# Altium PCB depth sensor.PcbDoc
Units mil, origin at the board's own origin, x right, y up, seen from the top; angles counter-clockwise.
Board outline 925 x 1535 mil, 2 copper layers (Top Layer, Bottom Layer); 23 components, 16 nets, 80 pads, 48 vias.
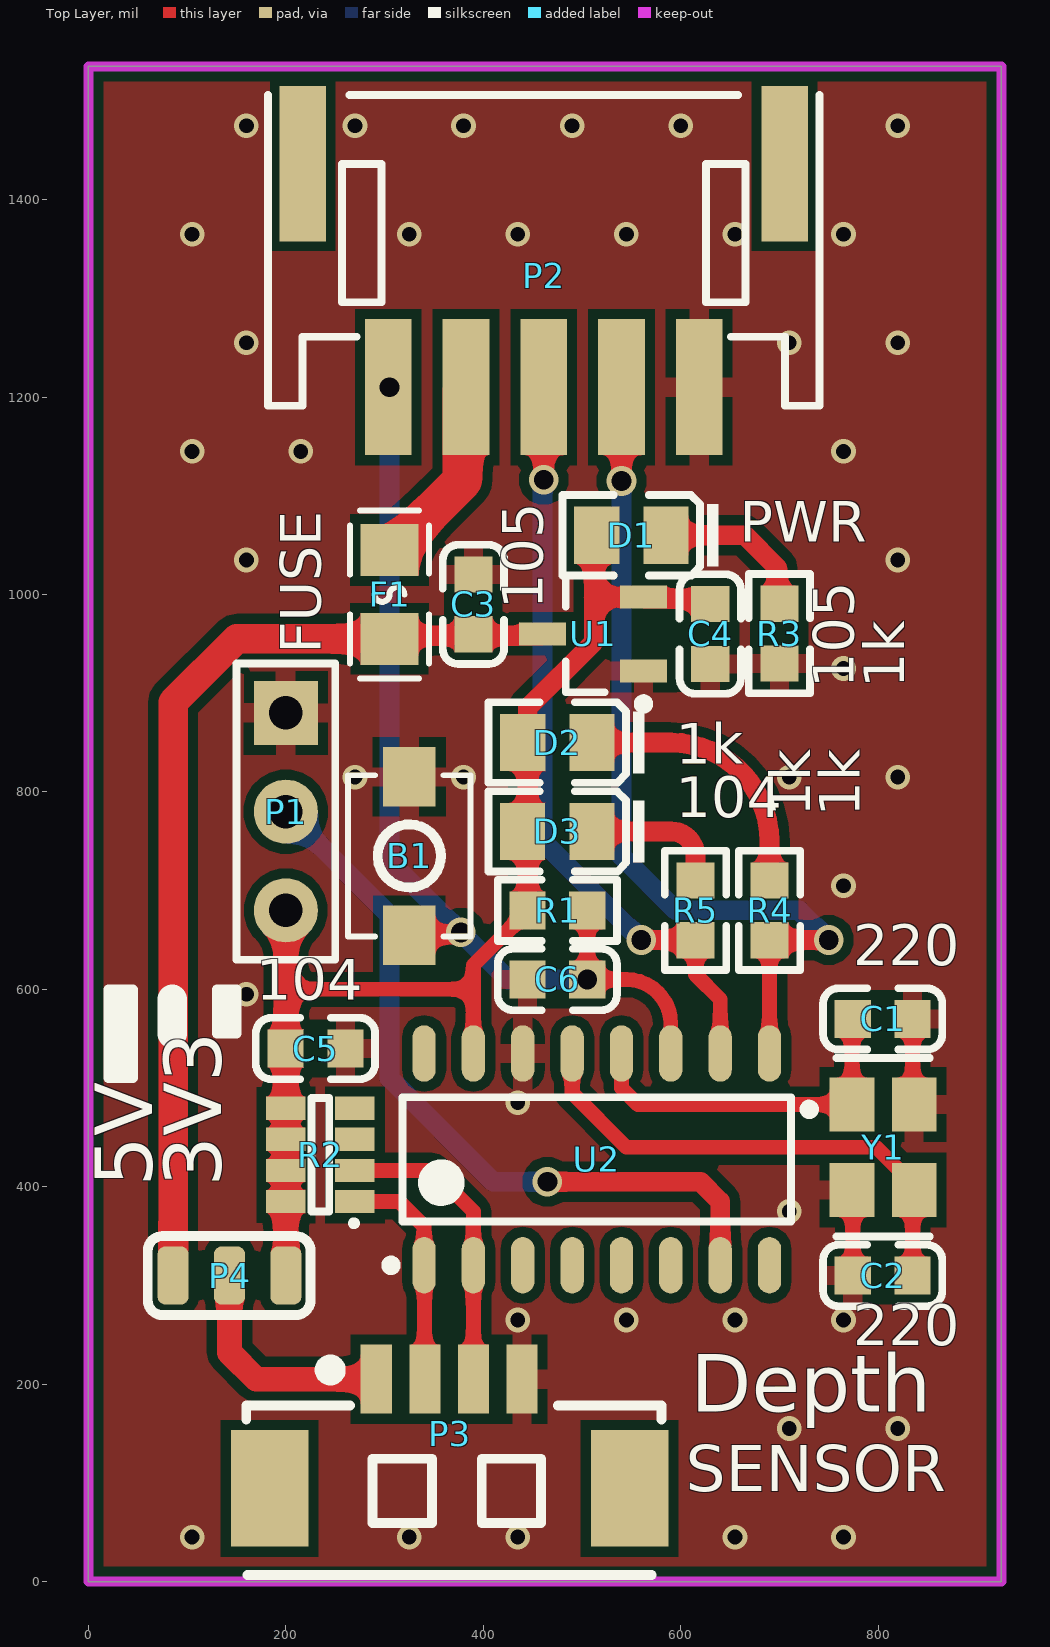
[diagram p0: Top Layer view]
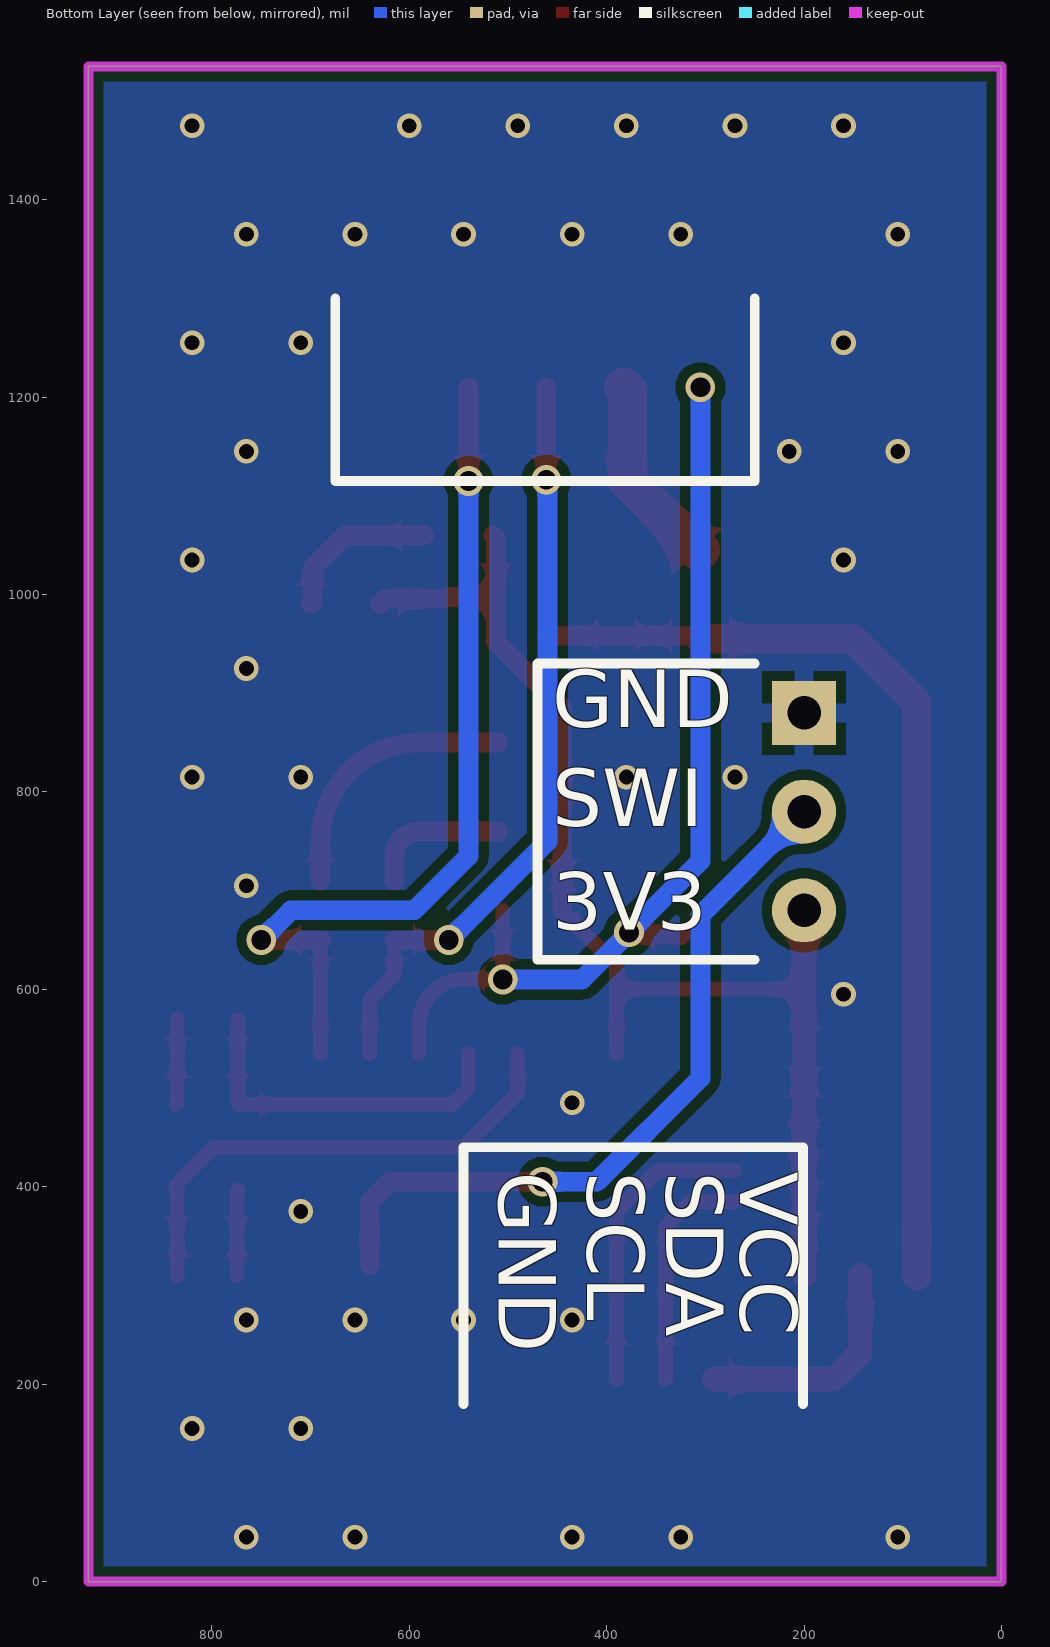
[diagram p1: Bottom Layer view, seen from below]
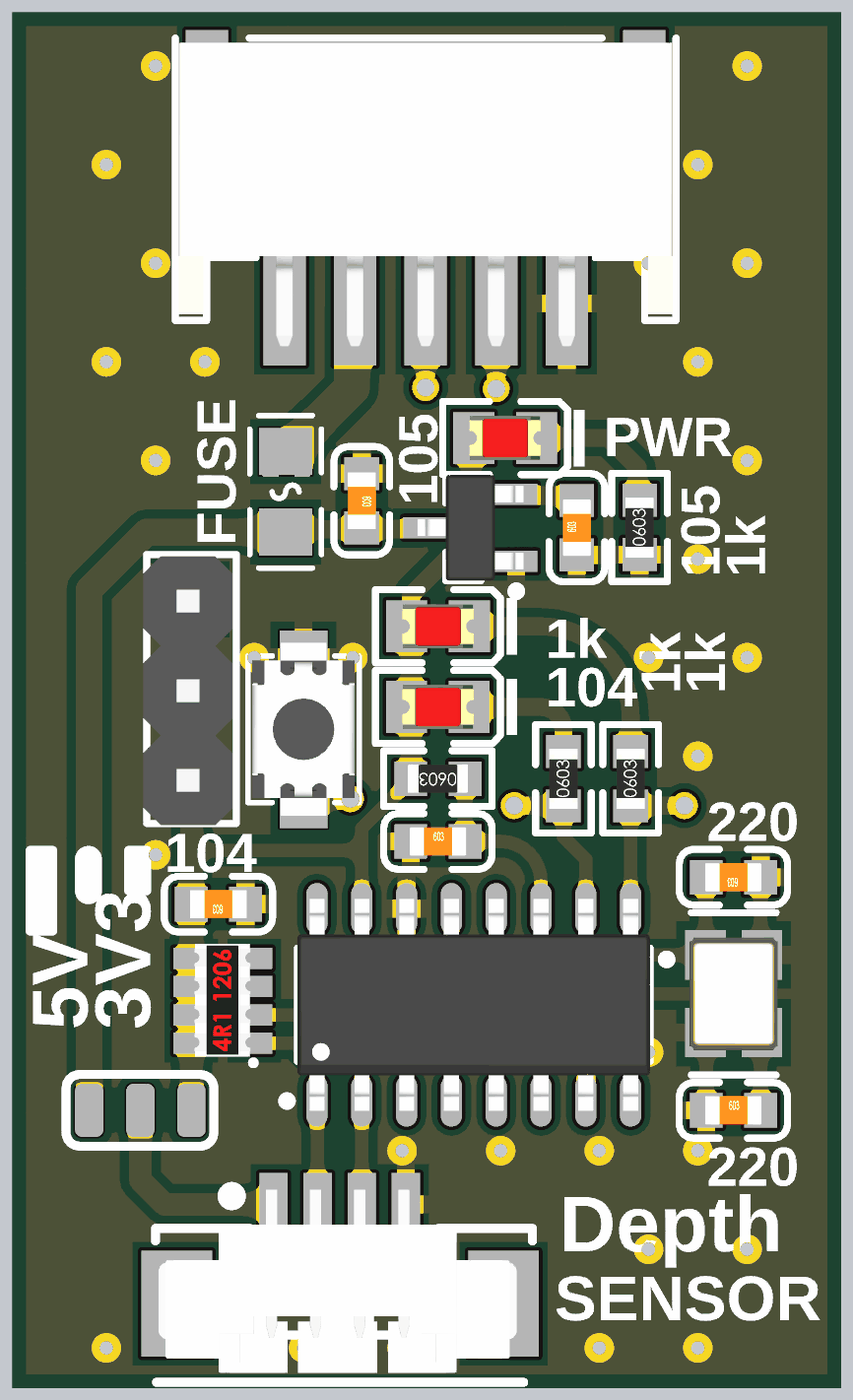
[diagram p2: 3D render of the assembled board from above, using the file's embedded part models]

## Layer stack, top to bottom
Top Solder: solder mask 0.4, Solder Resist, Dk 3.5
Top Layer: signal copper 1.4
Dielectric 1: dielectric 12.6, FR-4, Dk 4.8
Bottom Layer: signal copper 1.4
Bottom Solder: solder mask 0.4, Solder Resist, Dk 3.5

## Board outline
0,0 0,1535 925,1535 925,1485 925,220 925,0

## Design rules (kind name [scope] priority, off if disabled: settings)
Clearance [All] p1: gap=10 ignorepadtopadclearanceinfootprint=FALSE except(0: Arc-Hole Track-Hole SMDPad-Hole THPad-Hole Via-Hole Fill-Hole Poly-Hole Region-Hole Text-Hole; 5: Arc-Arc Arc-Track Arc-SMDPad Track-Track Track-SMDPad SMDPad-SMDPad)
PolygonConnect [All] p1: thpad.connectstyle=Relief thpad.reliefconductorwidth=20 thpad.reliefentries=4 thpad.polygonreliefangle="90 Angle" thpad.airgapwidth=10 smdpad.connectstyle=Relief smdpad.reliefconductorwidth=20 smdpad.reliefentries=4 smdpad.polygonreliefangle="90 Angle" smdpad.airgapwidth=10 via.connectstyle=Direct via.reliefconductorwidth=20 via.reliefentries=4 via.polygonreliefangle="90 Angle" via.airgapwidth=10
RoutingVias [All] p1: holewidth=28 width=50 viastyle="Through Hole" minholewidth=8 minwidth=12 maxholewidth=28 maxwidth=50
SolderMaskExpansion [All] p1: expansion=4 istentingtop=FALSE
Width [All] p1: maxlimit=200 minlimit=5 preferedwidth=10 minimp=50.000000 maximp=50.000000 favimp=50.000000
30 further rules are at their usual default settings.

## Components (designator, comment, footprint, x,y, rotation, side; value= is the part's Value field where it differs from the comment)
B1 "TS342A2P-WZ" SW-SMD_L4.0-W2.9-LS5.0 325,735.12 r270 top
C1 "22pF (220) 5% 50V" 0603_C 804.68,570 r180 top
C2 "22pF (220) 5% 50V" 0603_C 804.68,310 r0 top
C3 "1uF (105) 10% 50V" 0603_C 390,990 r270 top
C4 "1uF (105) 10% 50V" 0603_C 630,960 r90 top
C5 "100nF (104) 10% 50V" 0603_C 230,540 r180 top
C6 "100nF (104) 10% 50V" 0603_C 475,610 r0 top
D1 "红灯 0805" 0805_LED_S1 550,1060 r180 top
D2 "蓝灯 0805" 0805_LED_S1 475,850 r180 top
D3 "翠绿 0805" 0805_LED_S1 474.96,760 r180 top
F1 "SMD0805-110" F0805 305,1000.02 r270 top
P1 "Header 3" "Header 3" 205.18,785.97 r270 top
P2 "接线端子-5PIN" PH2.0-WS-5P 474.52,1363.01 r180 top
P3 "4PIN" MX1.25WS-4PIN 181.94,97.35 r0 top
P4 "电压选择" change 200,310 r270 top
R1 "1KΩ (1001) ±1%" 0603_R 475,680 r180 top
R2 "Res-4" res-4 233,430 r180 top
R3 "1KΩ (1001) ±1%" 0603_R 700,960.31 r90 top
R4 "1KΩ (1001) ±1%" 0603_R 690,680 r90 top
R5 "1KΩ (1001) ±1%" 0603_R 615,680 r90 top
U1 "LDO-3.3V" SOT95P290X110-3N 511.18,960 r180 top
U2 "MCU" TSOP127P600X155-16N 515,427.72 r90 top
Y1 "TSX-3225 24.0000MF20G-AC3" FP-TSX-3225-MFG 805,440 r270 top

## Footprints (in the part's own frame and the unit in brackets; to place one, negate y for a bottom-side part, rotate by r counter-clockwise, add the part's x,y. Pads: shape width x height; smd on the part's side, far side on the other; paste and mask are expansions set on the pad)
0603_C [mm]
  rect 0.93x0.98 smd: 1(-0.77,0) 2(0.77,0)
  silkscreen extent -1.53,-0.79 1.54,0.79, body extent -0.8,-0.4 0.8,0.4, height 0.3
0603_R [mm]
  rect 0.93x0.98 smd: 1(-0.77,0) 2(0.77,0)
  silkscreen extent -1.53,-0.79 1.54,0.79, body extent -0.85,-0.4 0.85,0.4, height 0.56
0805_LED_S1 [mm]
  rect 1.16x1.47 smd: A(0.89,0) K(-0.89,0)
  silkscreen extent -2.24,-1.04 1.77,1.03, body extent -1.01,-0.62 1.01,0.62, height 1.1
change [mm]
  rrect50% 1.5x0.8 smd mask+0.051: 1(0,0) 2(0,-1.45) 3(0,-2.9)
  silkscreen extent -1.02,-3.56 1.02,0.64
F0805 [mm]
  rect 1.335x1.5 smd mask+0.051: 1(-1.142,0) 2(1.142,0)
  silkscreen extent -2.16,-1.02 2.16,1.02
FP-TSX-3225-MFG [mm]
  rect 1.4x1.15 smd paste+0 mask+0: 1(-1.1,-0.8) 2(1.1,-0.8) 3(1.1,0.8) 4(-1.1,0.8)
  silkscreen extent -2.3,-2.02 2.3,1.2, body extent -1.9,-1.48 1.9,1.48, height 0.25
"Header 3" [mil]
  rect 65x65 hole 34: 1(-94.03,-5.18)
  round 65 hole 34: 2(5.97,-5.18) 3(105.97,-5.18)
  silkscreen extent -144,-55 156,45, body extent -142,-59 158,41, height 336
MX1.25WS-4PIN [mm]
  rect 2x3 smd: 0(0.042,-0.076) 0(9.306,-0.076)
  rect 0.8x1.778 smd: 1(2.785,2.734) 2(4.035,2.734) 3(5.285,2.734) 4(6.535,2.734)
  silkscreen extent -0.56,-2.3 10.12,3.17, body extent -0.47,-2.04 9.68,3.15, height 3.4
PH2.0-WS-5P [mm]
  rect 1.2x4 smd: 0(-5.863,-1.864) 0(6.537,-1.864)
  rect 1.2x3.5 smd: 1(-3.663,3.886) 2(-1.663,3.886) 3(0.337,3.886) 4(2.337,3.886) 5(4.337,3.886)
  silkscreen extent -6.76,-3.64 7.43,4.37, body extent -6.66,-3.51 7.34,5.09, height 5.55
res-4 [mil] "排阻"
  rect 40x23.62 smd: 1(-37,45) 2(-37,13.5) 3(-37,-17.99) 4(-37,-49.49) 5(33,-49.49) 6(33,-17.99) 7(33,13.5) 8(33,45)
  silkscreen extent -37,-60 7,68, body extent -33,-66 30,60, height 23
SOT95P290X110-3N [mm] "SOT23, 3-Leads, Body 2.90x2.90mm, Pitch 0.95mm, IPC Medium Density"
  rect 1.2x0.6 smd: 1(-1.3,0.95) 2(-1.3,-0.95) 3(1.3,0)
  silkscreen extent -1.43,-1.5 0.7,1.92, body extent -1.5,-1.5 1.5,1.5, height 1.1
SW-SMD_L4.0-W2.9-LS5.0 [mm]
  rect 1.53x1.36 smd mask+0.051: 1(-2.035,0) 2(2.035,0)
  silkscreen extent -2.08,-1.58 2.08,1.58, body extent -2.45,-1.45 2.45,1.45, height 2
TSOP127P600X155-16N [mm] "TSOP, 16-Leads, Body 10.00x3.90mm, Pitch 1.27mm, IPC Medium Density"
  oval 1.45x0.6 smd: 1(-2.725,4.445) 2(-2.725,3.175) 3(-2.725,1.905) 4(-2.725,0.635) 5(-2.725,-0.635) 6(-2.725,-1.905) 7(-2.725,-3.175) 8(-2.725,-4.445) 9(2.725,-4.445) 10(2.725,-3.175) 11(2.725,-1.905) 12(2.725,-0.635) 13(2.725,0.635) 14(2.725,1.905) 15(2.725,3.175) 16(2.725,4.445)
  silkscreen extent -2.85,-5 1.6,5.42, body extent -3,-5 3,5, height 1.55

## Part data
B1: JLCPCB Part Class="Extended Part", LCSC Part Name="轻触开关 3*4*2 两脚小龟不带柱 250gf 黑色塑胶按钮", Manufacturer="SHOU HAN(首韩)", Add into BOM=yes, Convert to PCB=yes, Datasheet=https://atta.szlcsc.com/upload/public/pdf/source/20200519/C557591_B3A5A21584733303F06306F18577DA8B.pdf, Device=TS342A2P-WZ, Manufacturer Part=TS342A2P-WZ, Supplier=LCSC, Supplier Footprint=SMD, Supplier Part=C557591, Symbol=TS342A2P-WZ
C1 C2: library part "0603 22pF (220) 5% 50V", "贴片电容", Package=0603, SuppliersPartNumber=C1653, ComponentLink1Description=供应商链接, ComponentLink1URL=http://www.szlcsc.com/product/details_2005.html, Supplier=LC
C3 C4: library part "0603 1uF (105) 10% 50V", "贴片电容", Package=0603, SuppliersPartNumber=C15849, ComponentLink1Description=供应商链接, ComponentLink1URL=http://www.szlcsc.com/product/details_16531.html, Supplier=LC
C5 C6: library part "0603 100nF (104) 10% 50V", "贴片电容", Package=0603, SuppliersPartNumber=C14663, ComponentLink1Description=供应商链接, ComponentLink1URL=http://www.szlcsc.com/product/details_15331.html, Supplier=LC
D1: library part "0805 红灯", "发光二极管", Package=0805, SuppliersPartNumber=C2295, ComponentLink1Description=供应商链接, ComponentLink1URL=http://www.szlcsc.com/product/details_2668.html, Supplier=LC
D2: library part "0805 蓝灯", "发光二极管", Package=0805, SuppliersPartNumber=C2293, ComponentLink1Description=供应商链接, ComponentLink1URL=http://www.szlcsc.com/product/details_2666.html, Supplier=LC
D3: library part "0805 翠绿", "发光二极管", Package=0805, SuppliersPartNumber=C2297, ComponentLink1Description=供应商链接, ComponentLink1URL=http://www.szlcsc.com/product/details_2670.html, Supplier=LC
F1: Current Rating (Max)=100A, Hold Current=1.1A, JLCPCB Part Class="Extended Part", Manufacturer=DOWO(东沃), Operating Temperature=-40℃~+85℃, Operating Voltage (Max)=6V, Power Dissipation=600mW, Resistance - Initial (Ri) (Min)=60mΩ, Resistance - Post Trip (R1) (Max)=210mΩ, Trip Current=2.2A, Add into BOM=yes, Convert to PCB=yes, Datasheet=https://atta.szlcsc.com/upload/public/pdf/source/20201106/C883453_C41FA8401A960BEA648423C0D5CB40C3.pdf, Device=SMD0805-110, LCSC Part Name=SMD0805-110, Manufacturer Part=SMD0805-110, Maximum Time to Trip=0.3s, Supplier=LCSC, Supplier Footprint=0805, Supplier Part=C883453, Symbol=SMD0805-110_C883453
P1: "排针"
P3: library part 接线端子-4PIN
R1 R3 R4 R5: library part "0603 1KΩ (1001) 1%", "贴片电阻", Package=0603, SuppliersPartNumber=C21190, ComponentLink1Description=供应商链接, ComponentLink1URL=http://www.szlcsc.com/product/details_21904.html, Supplier=LC
R2: "排阻"
U1: library part CE6219
U2: library part CH32V003A4M6
Y1: library part CMP-36405-000018-1, "CRYSTAL 24.0000MHZ 9PF SMD", Case/Package=SMD/SMT, ESR (Equivalent Series Resistance)=40R, Frequency=24MHz, Frequency Stability=20ppm, Frequency Tolerance=10ppm, Load Capacitance=9pF, Max Operating Temperature=105°C, Min Operating Temperature=-40°C, Package Quantity=250, Depth=2.5mm, Drive Level=200uW, Height=0.024inch, Lead Free="Lead Free", Length=3.2mm, Mount="Surface Mount", Number of Pins=4, Packaging="Tape and Reel", RoHS Compliant=Yes, Series=TSX-3225, Termination=SMD/SMT, Tolerance=10ppm, Weight=0.000564oz, Width=2.5mm

## Via types
v1: diameter 25, hole 15, Top Layer to Bottom Layer, 40 vias
v2: diameter 30, hole 20, Top Layer to Bottom Layer, 8 vias

## Nets (pads, with @x,y where several pads share a name; then routed paths per layer and width w, separated by ;. In a path a pad name is that pad's centre, name@x,y a point inside that pad or via, vN(x,y) a via of type N, cw(c..) or ccw(c..) an arc to the next point about the centre after c; other vN are vias at no path point)
+3.3V: C4.2 C5.2 D1.A D2.A D3.A P1.3 P4.1 R1.2 R2.5 R2.6 R2.7 R2.8 U1.2 U2.15 | length 1268.5
  Top Layer w15: 200,600 390,600 ; U2.15 390,600 ; R1.2@445,680 445,679.33 390,624.33 390,600
  Top Layer w20: R1.2@445,680 445,885 512.02,952.02 512.02,997.4 ; D1.A 512.02,1057.06 512.02,997.4 ; C4.2 624.72,995.59 564.17,995.59 U1.2 512.02,997.4
  Top Layer w25: P4.1 R2.8 R2.7 R2.6 R2.5 200,600 P1.3 P1.3@210.82,680
+5: C3.2 F1.2 P4.3 U1.3 | length 983.7
  Top Layer w20: F1.2 308.15,958.19 458.19,958.19 U1.3
  Top Layer w30: P4.3 85.83,890.83 150.04,955.04 F1.2
GND: B1.1 C1.1 C2.1 C3.1 C4.1 C5.1 C6.1 P1.1 P2.1 P3.4 R3.1 U1.1 U2.14 Y1.2 Y1.4 | length 174.4
  Top Layer w15: Y1.2 774.37,395.83 C2.1 ; C1.1 835,484.8 Y1.4
  other v1: 105,45 325,45 435,45 655,45 765,45 710,155 820,155 435,265 545,265 655,265 765,265 710,375 435,485 160,595 765,705 270,815 380,815 710,815 820,815 765,925 160,1035 820,1035 105,1145 215,1145 765,1145 160,1255 710,1255 820,1255 105,1365 325,1365 435,1365 545,1365 655,1365 765,1365 160,1475 270,1475 380,1475 490,1475 600,1475 820,1475
NetD1_K: D1.K R3.2 | length 163.8
  Top Layer w20: D1.K 665,1060 697.78,1027.22 697.78,992.85 R3.2
NetD2_K: D2.K R4.2 | length 276.7
  Top Layer w20: D2.K 590,850 cw(c590,750) 690,750 R4.2
NetD3_K: D3.K R5.2 | length 144
  Top Layer w20: D3.K 590,760 cw(c590,735) 615,735 R5.2
NetF1_1: F1.1 P2.4 | length 199
  Top Layer w40: F1.1 308.25,1045 378.9,1115.65 378.9,1206.38 P2.4
RES: B1.2 C6.2 P2.5 R1.1 U2.11 | length 993.8
  Top Layer w15: R1.1 v2(505.31,610) 545,610 cw(c545,565) 590,565 U2.11
  Top Layer w20: B1.2 325.56,655.56 375.27,655.56 v2(377.35,657.65)
  Bottom Layer w20: v2(305,1210) 305,730 v2(377.35,657.65) 425,610 v2(505.31,610)
RX: P2.2 R4.1 U2.9 | length 896
  Top Layer w15: U2.9 R4.1
  Top Layer w20: v2(540,1115) P2.2 ; R4.1@689.02,649.69 689.17,649.84 749.84,649.84 v2(750,650)
  Bottom Layer w20: v2(540,1115) 540,735 595,680 720,680 v2(750,650)
SCL: P3.3 R2.2 U2.2 | length 307.2
  Top Layer w15: R2.2 348.5,416.5 390,375 U2.2 P3.3
SDA: P3.2 R2.1 U2.1 | length 235.7
  Top Layer w15: R2.1 315,385 340,360 U2.1 340.39,320.04 340.39,205.39 P3.2
SWIO: P1.2 U2.7 | length 764.8
  Top Layer w20: v2(465,405) 620,405 640,385 U2.7
  Bottom Layer w20: P1.2 305,675 305,510 410,405 v2(465,405)
TX: P2.3 R5.1 U2.10 | length 783
  Top Layer w15: R5.1 615,615 640,590 U2.10
  Top Layer w20: P2.3@460.63,1209.37 P2.3 v2(461.26,1116.26) ; v2(560,650) 560.16,649.84 614.84,649.84 R5.1
  Bottom Layer w20: v2(461.26,1116.26) 460,1115 460,750 v2(560,650)
VCC: P3.1 P4.2 | length 237.8
  Top Layer w25: P4.2 142.91,232.09 170,205 P3.1
XI: C1.2 U2.12 Y1.1 | length 361.3
  Top Layer w15: U2.12@540.13,535 540.13,499.87 556.69,483.31 Y1.1 ; Y1.1@773.63,483.31 C1.2@773.63,569.26
XO: C2.2 U2.13 Y1.3 | length 517.4
  Top Layer w15: U2.13 490,495 545,440 798.11,440 836.5,401.61 Y1.3 835,395.2 C2.2
pads on no net: P2.0 P3.0 R2.3 R2.4 U2.3 U2.4 U2.5 U2.6 U2.8 U2.16

## Polygon pours and split planes (outlines as drawn)
GND on Top Layer "TOP_GND" (solid, remove dead copper, pour order 0): 0,0 0,1535 925,1535 925,1485 925,220 925,0
GND on Bottom Layer "BOTTOM_GND" (solid, remove dead copper, pour order 1): 0,0 0,1535 925,1535 925,1485 925,220 925,0

## Keep-outs
Keep-Out Layer:
  lines w10: 0,0 925,0 925,220 925,1535 0,1535 0,0

## Silkscreen, mask and mechanical layers (free items; w line width, h text height)
Top Overlay:
  region: 130,555 130,600 150,600 150,555
  region: 20,510 20,600 45,600 45,510
  lines w10: 20,510 20,600 45,600 45,510 20,510 ; 130,555 150,555 150,600 130,600 130,555
  lines w30: 85,555 85,590
  text "PWR" at 660,1040 h70
  text "105" at 474.16,985 h70 r90
  text "FUSE" at 249.16,940 h70 r90
  text "105" at 789.16,905 h70 r90
  text "1k" at 840,905 h70 r90
  text "1k" at 595,815 h70
  text "1k" at 745,775 h70 r90
  text "1k" at 795,775 h70 r90
  text "104" at 595,760.84 h70
  text "220" at 775,610.84 h70
  text "104" at 170,575.84 h70
  text "5V" at 83.8,400 h100 r90
  text "3V3" at 153.8,400 h100 r90
  text "220" at 775,225.84 h70
  text "Depth" at 610,152.76 h100
  text "SENSOR" at 605,75.96 h80
Bottom Overlay:
  lines w10: 201.25,180 201.25,440 545,440 545,180 ; 250,630 470,630 470,930 250,930 ; 250,1300 250,1115 675,1115 675,1300
  text "GND" at 455,846.2 h100
  text "SWI" at 455,746.2 h100
  text "3V3" at 455,641.2 h100
  text "VCC" at 283.89,415 h100 r90
  text "SDA" at 358.8,415 h100 r90
  text "SCL" at 438.8,415 h100 r90
  text "GND" at 528.8,415 h100 r90
Mechanical 1:
  lines w15: 0,0 925,0 ; 0,0 0,1535 ; 0,0 925,0 ; 0,0 0,1535 ; 0,1535 925,1535 ; 0,1535 925,1535 ; 925,0 925,220 ; 925,0 925,220 ; 925,220 925,1485 ; 925,220 925,1485 ; 925,1485 925,1535 ; 925,1485 925,1535